# Altium PCB EEU_SEH.PcbDoc
Units mil, origin at the board's own origin, x right, y up, seen from the top; angles counter-clockwise.
Board outline 985.52 x 985.8 mil, 2 copper layers (Top Layer, Bottom Layer); 2 components, 7 nets, 40 pads, 0 vias.
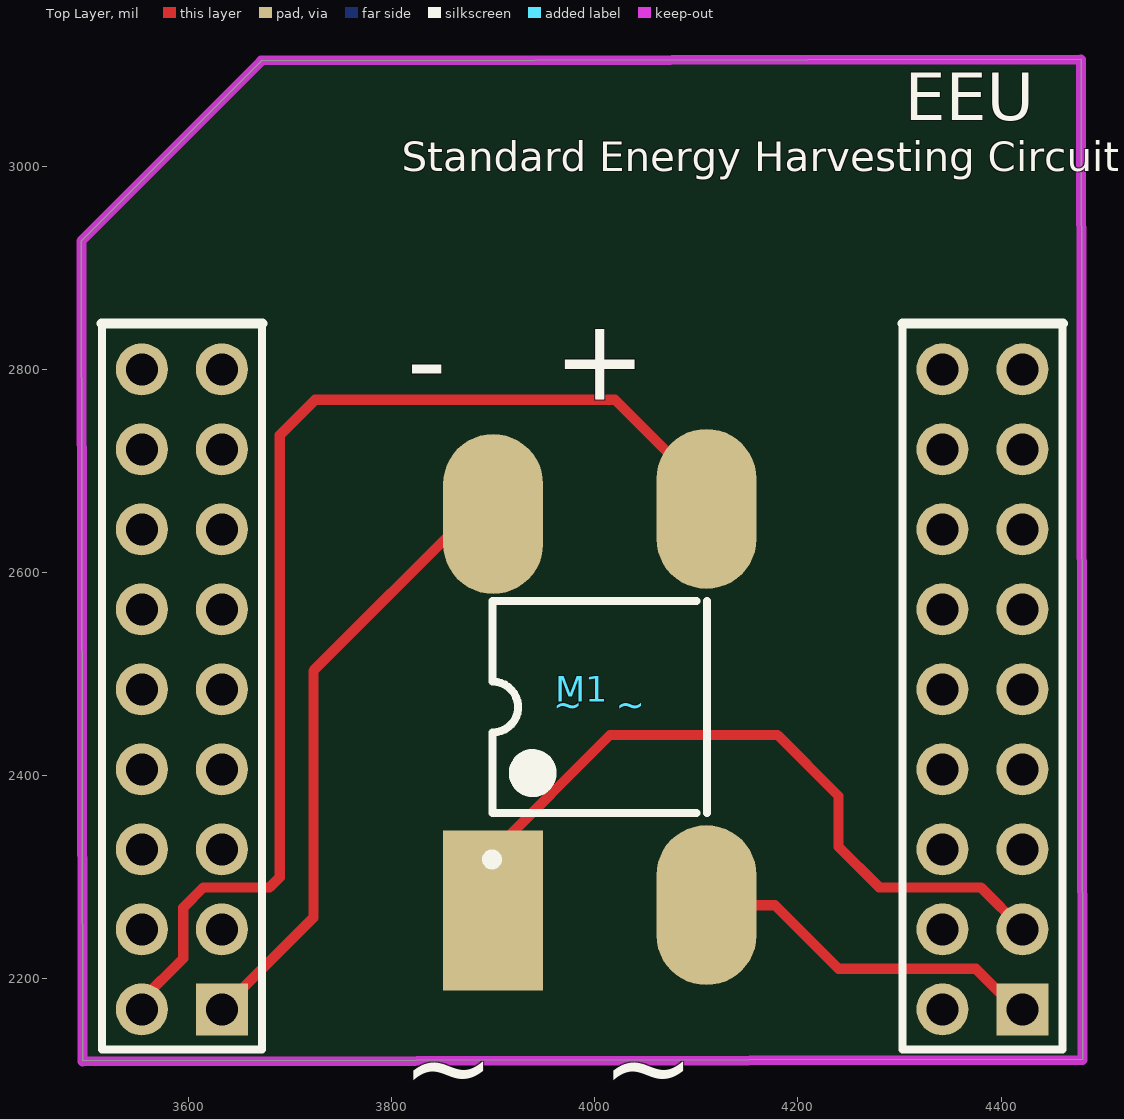
[diagram p0: Top Layer view]
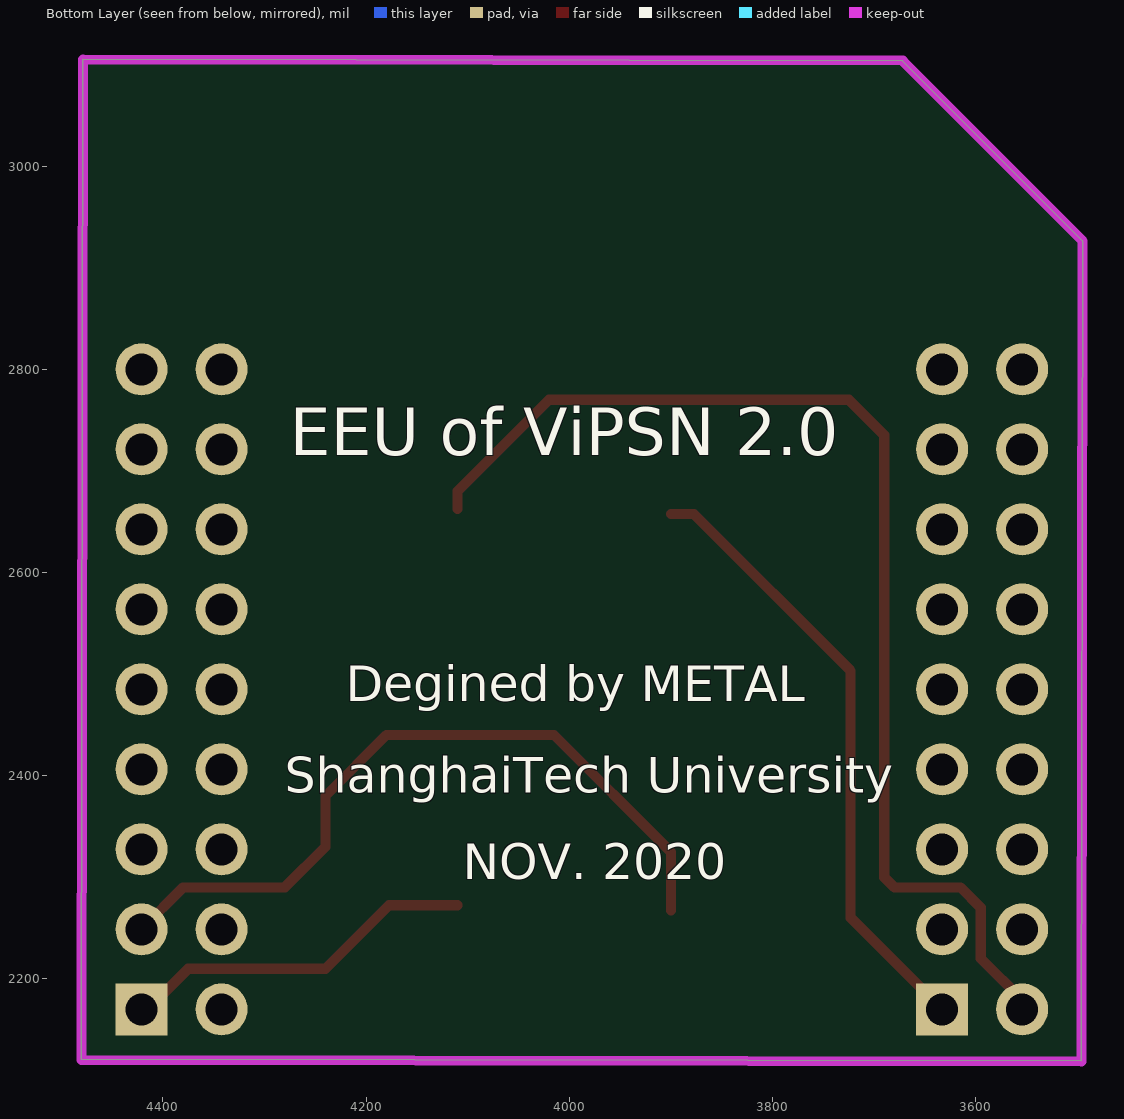
[diagram p1: Bottom Layer view, seen from below]

## Layer stack, top to bottom
Top Layer: signal copper 1.4
Dielectric: dielectric 12.6, FR-4, Dk 4.8
Bottom Layer: signal copper 1.4

## Board outline
3496,2119.2 3494.73,2926.29 3671.89,3103.45 3671.61,3103.73 4478.7,3105 4480.25,2120.75

## Design rules (kind name [scope] priority, off if disabled: settings)
Clearance [All] p1: gap=5
PolygonConnect [All] p1: connectstyle=Relief reliefconductorwidth=10 reliefentries=4 polygonreliefangle="90 Angle"
RoutingVias [All] p1: holewidth=28 width=50 viastyle="Through Hole" minholewidth=28 minwidth=50 maxholewidth=28 maxwidth=50
SilkscreenOverComponentPads SilkToSolderMaskClearance [IsPad] p1: minsilkscreentomaskgap=10
SolderMaskExpansion [All] p1: expansion=4
Width [All] p1: maxlimit=10 minlimit=10 preferedwidth=10
27 further rules are at their usual default settings.

## Classes and differential pairs
component class EEU_SEH: MB6S

## Components (designator, comment, footprint, x,y, rotation, side; value= is the part's Value field where it differs from the comment)
M1 "MHDR2X18" MODULE9X4 4420,2800 r180 top
"~   ~" "3" SOP-4BIG 3995,2465 r90 top (schematic designator B1)

## Footprints (in the part's own frame and the unit in brackets; to place one, negate y for a bottom-side part, rotate by r counter-clockwise, add the part's x,y. Pads: shape width x height; smd on the part's side, far side on the other; paste and mask are expansions set on the pad)
MODULE9X4 [mm]
  rect 1.3x1.3 hole 0.8: 1(-0.025,16.002) 36(19.99,16.002)
  round 1.3 hole 0.8: 2(21.99,16.002) 3(-0.025,14.002) 4(21.99,14.002) 5(-0.025,12.002) 6(21.99,12.002) 7(-0.025,10.002) 8(21.99,10.002) 9(-0.025,8.002) 10(21.99,8.002) 11(-0.025,6.002) 12(21.99,6.002) 13(-0.025,4.002) 14(21.99,4.002) 15(-0.025,2.002) 16(21.99,2.002) 17(-0.025,0.002) 18(21.99,0.002) 19(1.975,0.002) 20(19.99,0.002) 21(1.975,2.002) 22(19.99,2.002) 23(1.975,4.002) 24(19.99,4.002) 25(1.975,6.002) 26(19.99,6.002) 27(1.975,8.002) 28(19.99,8.002) 29(1.975,10.002) 30(19.99,10.002) 31(1.975,12.002) 32(19.99,12.002) 33(1.975,14.002) 34(19.99,14.002) 35(1.975,16.002)
  silkscreen extent -1.04,-1.14 22.99,17
SOP-4BIG [mil] "DIP; 4 Leads; Row Spacing 7.62 mm; Pitch 2.54 mm"
  rect 157.48x98.43 smd: 1(-197.5,95)
  oval 157.48x98.43 smd: 2(-192.5,-115) 3(197.5,-115) 4(192.5,95)
  silkscreen extent -152,-115 107,101, body extent -122,-103 127,93, height 220

## Part data
M1: "Header, 18-Pin, Dual row"
"~   ~": library part mb6m

## Nets (pads, with @x,y where several pads share a name; then routed paths per layer and width w, separated by ;. In a path a pad name is that pad's centre, name@x,y a point inside that pad or via, vN(x,y) a via of type N, cw(c..) or ccw(c..) an arc to the next point about the centre after c; other vN are vias at no path point)
+12V: 
GND: "~   ~.4" M1.36 | length 611.3
  Top Layer w10: M1.36 3723.12,2260.13 3723.12,2315 3723.12,2503.12 3877.5,2657.5 3900,2657.5
NetB1_1: 
NetB1_2: 
PZ1: "~   ~.1" M1.3 | length 734.8
  Top Layer w10: 3900,2267.5 3900,2325 4015,2440 4180,2440 4240,2380 4240,2330 4280,2290 4380,2290 4421,2249 M1.3
PZ2: "~   ~.2" M1.1 | length 353.5
  Top Layer w10: 4110,2272.5 4177.5,2272.5 4240,2210 4375,2210 4415,2170 M1.1
VSTO: "~   ~.3" M1.2 | length 1148.6
  Top Layer w10: M1.2 3554.25,2179.25 3595,2220 3595,2270 3615,2290 3680,2290 3690,2300 3690,2735 3725,2770 4020,2770 4110,2680 4110,2662.5
pads on no net: M1.4 M1.5 M1.6 M1.7 M1.8 M1.9 M1.10 M1.11 M1.12 M1.13 M1.14 M1.15 M1.16 M1.17 M1.18 M1.19 M1.20 M1.21 M1.22 M1.23 M1.24 M1.25 M1.26 M1.27 M1.28 M1.29 M1.30 M1.31 M1.32 M1.33 M1.34 M1.35

## Keep-outs
Keep-Out Layer:
  lines w10: 3671.61,3103.73 4478.7,3105 4480.25,2120.14 3496,2118.59 3494.73,2926.29 3671.89,3103.45

## Silkscreen, mask and mechanical layers (free items; w line width, h text height)
Top Overlay:
  text "EEU" at 4305,3030 h80
  text "Standard Energy Harvesting Circuit" at 3810,2985 h50
  text "-   +" at 3815,2770 h80
Bottom Overlay:
  text "EEU of ViPSN 2.0" at 4275,2700 h80
  text "Degined by METAL" at 4220,2461.3 h60
  text "ShanghaiTech University" at 4280,2371.3 h60
  text "NOV. 2020" at 4105,2286.3 h60